# Altium PCB W5500_PCB.PcbDoc
Units mil, origin at the board's own origin, x right, y up, seen from the top; angles counter-clockwise.
Board outline 2170 x 1230 mil, 2 copper layers (Top Layer, Bottom Layer); 44 components, 37 nets, 156 pads, 37 vias.
Unrouted connection lines stored in the file: 1.
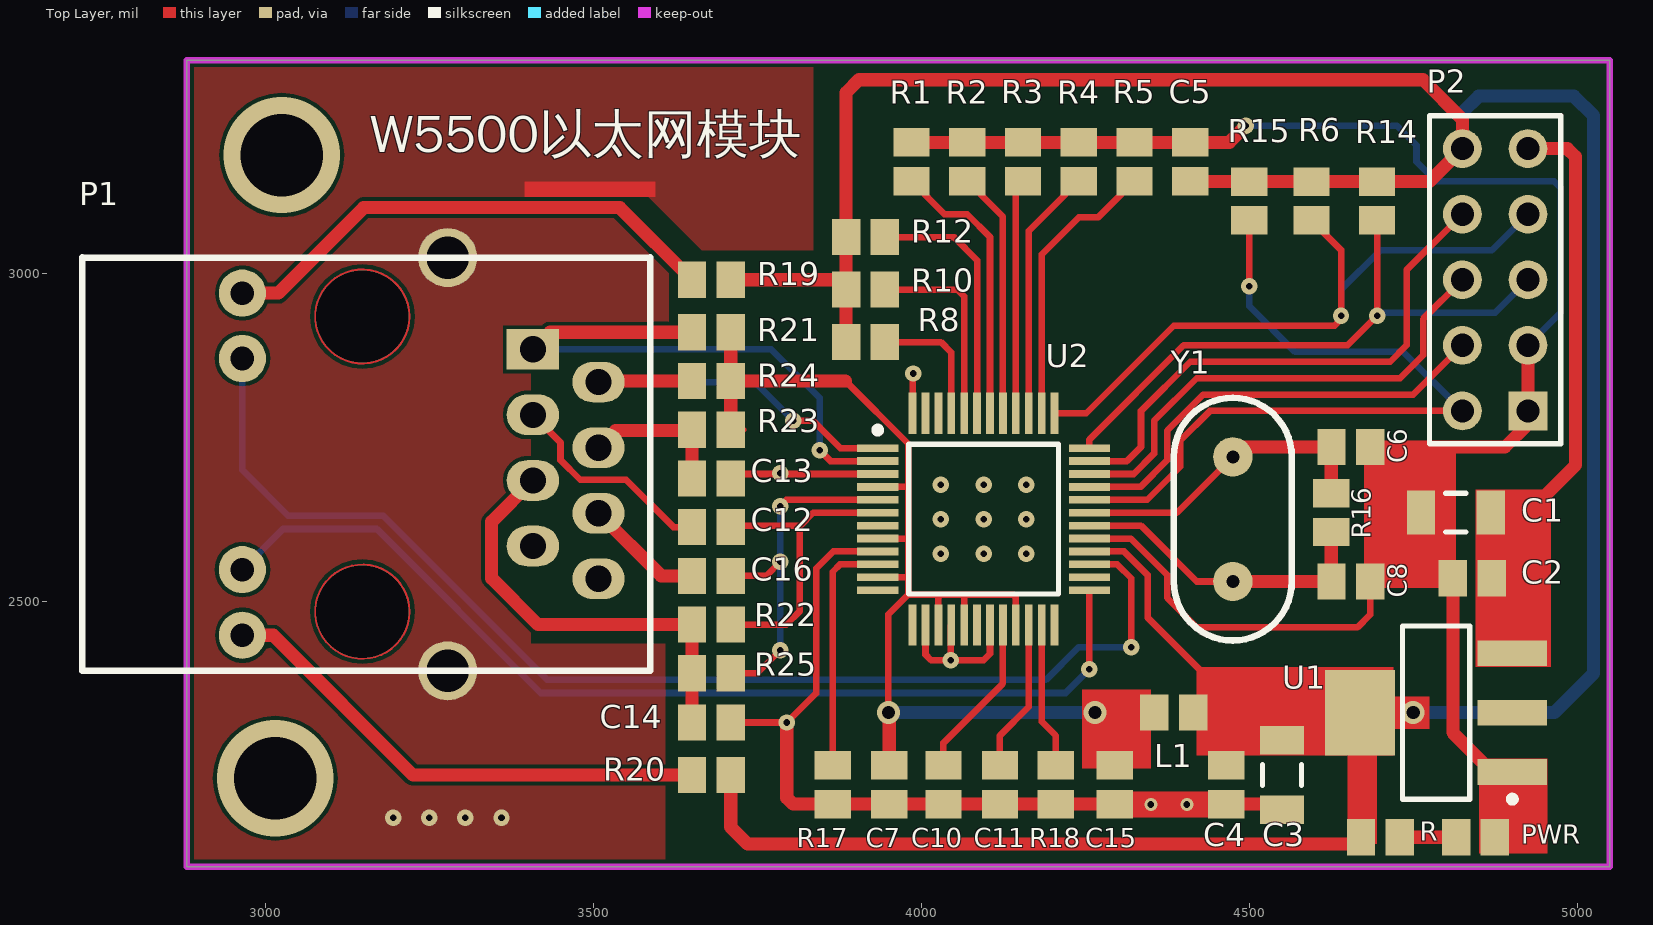
[diagram p0: Top Layer view]
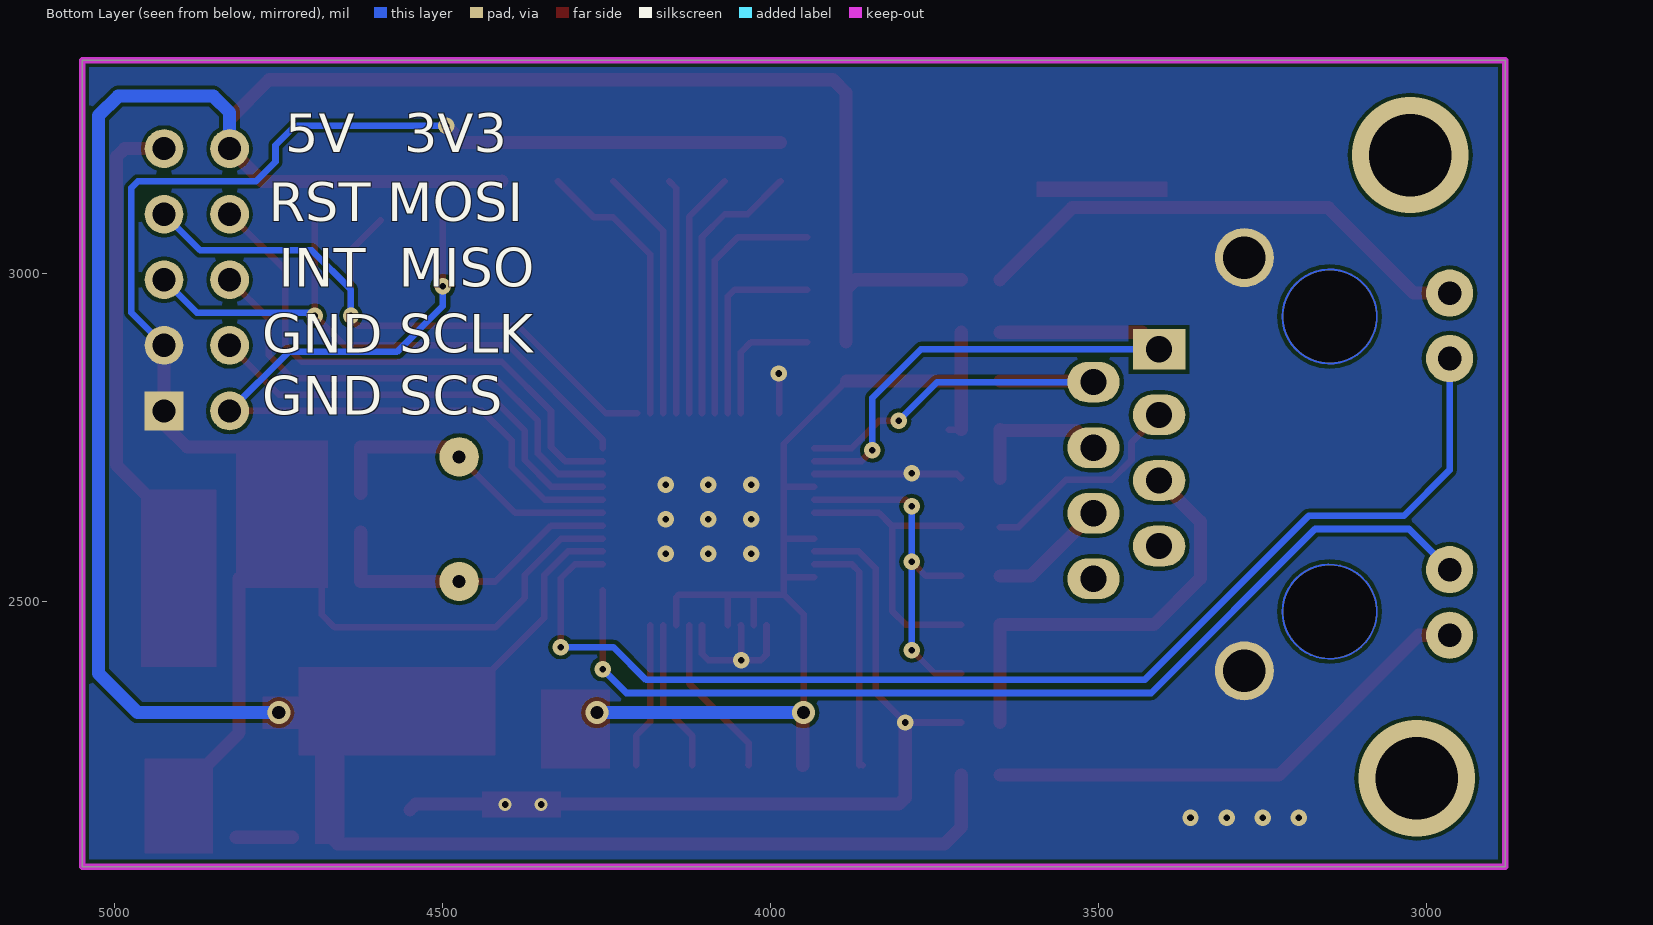
[diagram p1: Bottom Layer view, seen from below]

## Layer stack, top to bottom
Top Solder: solder mask 0.4, Solder Resist, Dk 3.5
Top Layer: signal copper 1.4
Dielectric 1: dielectric 12.6, FR-4, Dk 4.8
Bottom Layer: signal copper 1.4
Bottom Solder: solder mask 0.4, Solder Resist, Dk 3.5

## Board outline
2880,2095 2880,3325 5050,3325 5050,2095

## Design rules (kind name [scope] priority, off if disabled: settings)
Clearance [All] p1: gap=6 ignorepadtopadclearanceinfootprint=FALSE
DiffPairsRouting [All] p1: maxlimit=10 minlimit=5 mostfreqgap=10 toplayer_minwidth=2 toplayer_maxwidth=15 toplayer_prefwidth=15 bottomlayer_minwidth=2 bottomlayer_maxwidth=15 bottomlayer_prefwidth=15 maxuncoupledlength=500
PolygonConnect [All] p1: connectstyle=Direct reliefconductorwidth=10 reliefentries=4 polygonreliefangle="90 Angle" airgapwidth=10
RoutingVias [All] p1: holewidth=28 width=50 viastyle="Through Hole" minholewidth=200 minwidth=500 maxholewidth=0 maxwidth=0
SolderMaskExpansion [All] p1: expansion=3
Width [All] p1: maxlimit=50 minlimit=10 preferedwidth=10
29 further rules are at their usual default settings.

## Components (designator, comment, footprint, x,y, rotation, side; value= is the part's Value field where it differs from the comment)
C1 "tanCap" C1206 4815,2635 r180 top value=10uF
C2 "Cap" C0805 4840,2535 r180 top value=0.1uF
C3 "tanCap" C1206 4550,2235 r270 top value=10uF
C4 "Cap" C0805 4465,2220 r270 top value=0.1uF
C5 "Cap" C0805 4410,3170 r90 top value=0.1uF
C6 "Cap" C0805 4655,2735 r180 top value=18pF
C7 "Cap" C0805 3951.25,2220 r270 top value=0.1uF
C8 "Cap" C0805 4655,2530 r180 top value=18pF
C10 "Cap" C0805 4033.75,2220 r270 top value=4.7uF
C11 "Cap" C0805 4120,2220 r270 top value=0.01uF
C12 "Cap" C0805 3680,2612.86 r0 top value=6.8nF
C13 "Cap" C0805 3680,2687.14 r180 top value=22nF
C14 "Cap" C0805 3680,2315 r180 top value=0.01uF
C15 "Cap" C0805 4295,2220 r90 top value=0.1uF
C16 "Cap" C0805 3680,2538.57 r0 top value=6.8nF
L1 "Inductor" C0805 4385,2330 r180 top value=1uH
P1 "HR911105A" HR911105A 3407.91,2884 r180 top
P2 "排针引出" HDR2X5 4925,2790 r90 top
PWR "POWER" C0805 4845,2140 r0 top (schematic designator D1)
R "Res2" C0805 4700,2140 r180 top value=1K (schematic designator R13)
R1 "Res2" C0805 3985,3170 r90 top value=10K
R2 "Res2" C0805 4070,3170 r90 top value=10K
R3 "Res2" C0805 4155,3170 r90 top value=10K
R4 "Res2" C0805 4240,3170 r90 top value=10K
R5 "Res2" C0805 4325,3170 r90 top value=10K
R6 "Res2" C0805 4595,3110 r90 top value=10K
R8 "Res2" C0805 3915,2895 r180 top value=10K
R10 "Res2" C0805 3915,2975 r180 top value=10K
R12 "Res2" C0805 3915,3055 r180 top value=10K
R14 "Res2" C0805 4695,3110 r90 top value=10K
R15 "Res2" C0805 4500,3110 r90 top value=10K
R16 "Res2" C0805 4625,2635 r90 top value=1M
R17 "Res2" C0805 3865,2220 r90 top value="12.4K 1%"
R18 "Res2" C0805 4205,2220 r90 top value=10K
R19 "Res2" C0805 3680,2990 r180 top value=1K
R20 "Res2" C0805 3680,2235 r180 top value=1K
R21 "Res2" C0805 3680,2910 r0 top value=51R
R22 "Res2" C0805 3680,2464.29 r0 top value=82R
R23 "Res2" C0805 3680,2761.43 r0 top value=51R
R24 "Res2" C0805 3680,2835.71 r0 top value=51R
R25 "Res2" C0805 3680,2390 r180 top value=82R
U1 "AMS1117-3.3" SOT223_M 4785,2330 r180 top
U2 "W5500" LQFP48 4095,2625 r90 top
Y1 "25MHz" XTAL-HC49 4475,2530 r90 top

## Footprints (in the part's own frame and the unit in brackets; to place one, negate y for a bottom-side part, rotate by r counter-clockwise, add the part's x,y. Pads: shape width x height; smd on the part's side, far side on the other; paste and mask are expansions set on the pad)
C0805 [mm] "Chip Capacitor, Body 2.0x1.3mm, IPC High Density"
  rect 1.1x1.4 smd: 1(-0.75,0) 2(0.75,0)
  body extent -1.1,-0.72 1.1,0.72, height 1.4
C1206 [mm] "Chip Capacitor, Body 3.2x1.6mm, IPC High Density"
  rect 1.1x1.7 smd: 1(-1.35,0) 2(1.35,0)
  silkscreen extent -0.4,-0.75 0.4,0.75, body extent -1.7,-0.9 1.7,0.9, height 1.3
HDR2X5 [mm] "Connector; Header; 5x2 Position"
  rect 1.5x1.5 hole 0.9: 1(0,0)
  round 1.5 hole 0.9: 2(0,2.54) 3(2.54,0) 4(2.54,2.54) 5(5.08,0) 6(5.08,2.54) 7(7.62,0) 8(7.62,2.54) 9(10.16,0) 10(10.16,2.54)
  silkscreen extent -1.27,-1.27 11.43,3.81
HR911105A [mil]
  rect 80x62 hole 40: 1(0,0)
  oval 80x62 hole 40: 2(-100,50) 3(0,100) 4(-100,150) 5(0,200) 6(-100,250) 7(0,300) 8(-100,350)
  round 72 hole 36: 9(442.91,-85.63) 10(442.91,14) 11(442.91,335.87) 12(442.91,436)
  round 90 hole 65: 13(129.92,-139.76) 14(129.92,490.16)
  Multi-Layer circle w5: c260,-50 r70.8
  Multi-Layer circle w5: c260,400 r70.8
  silkscreen extent -179,-140 687,490
LQFP48 [mm]
  rect 0.3x1.6 smd: 1(2.75,4.1) 2(2.25,4.1) 3(1.75,4.1) 4(1.25,4.1) 5(0.75,4.1) 6(0.25,4.1) 7(-0.25,4.1) 8(-0.75,4.1) 9(-1.25,4.1) 10(-1.75,4.1) 11(-2.25,4.1) 12(-2.75,4.1) 25(-2.75,-4.1) 26(-2.25,-4.1) 27(-1.75,-4.1) 28(-1.25,-4.1) 29(-0.75,-4.1) 30(-0.25,-4.1) 31(0.25,-4.1) 32(0.75,-4.1) 33(1.25,-4.1) 34(1.75,-4.1) 35(2.25,-4.1) 36(2.75,-4.1)
  rect 1.6x0.3 smd: 13(-4.1,2.75) 14(-4.1,2.25) 15(-4.1,1.75) 16(-4.1,1.25) 17(-4.1,0.75) 18(-4.1,0.25) 19(-4.1,-0.25) 20(-4.1,-0.75) 21(-4.1,-1.25) 22(-4.1,-1.75) 23(-4.1,-2.25) 24(-4.1,-2.75) 37(4.1,-2.75) 38(4.1,-2.25) 39(4.1,-1.75) 40(4.1,-1.25) 41(4.1,-0.75) 42(4.1,-0.25) 43(4.1,0.25) 44(4.1,0.75) 45(4.1,1.25) 46(4.1,1.75) 47(4.1,2.25) 48(4.1,2.75)
  silkscreen extent -2.9,-2.9 3.57,4.22
SOT223_M [mm] "SOT223, 4-Leads, Body 6.5x3.5mm, Pitch 2.3mm, Lead Span 7mm, IPC Low Density"
  rect 2.7x1 smd: 1(-2.95,2.3) 2(-2.95,0) 3(-2.95,-2.3)
  rect 2.7x3.3 smd: 4(2.95,0)
  silkscreen extent -3.08,-3.35 1.3,3.47, body extent -1.85,-3.35 1.85,3.35, height 1.7
XTAL-HC49 [mil]
  round 60 hole 19.68: 1(0,0) 2(190,0)
  silkscreen extent -90,-90 280,90

## Part data
C1 C3: library part "Cap Pol2", "Polarized Capacitor (Axial)", LatestRevisionDate=17-Jul-2002, LatestRevisionNote="Re-released for DXP Platform.", PackageDescription="Polarized Capacitor; 2 Leads", PackageReference=POLAR0.8, Published=8-Jun-2000, Publisher="Altium Limited"
C2 C4 C5 C6 C7 C8 C10 C11 C12 C13 C14 C15 C16: "Capacitor", LatestRevisionDate=17-Jul-2002, LatestRevisionNote="Re-released for DXP Platform.", PackageDescription="Radial Cap, Thru-Hole; 2 Leads; 0.3 in Pin Spacing", PackageReference=RAD-0.3, Published=8-Jun-2000, Publisher="Altium Limited"
P1: "RJ45插座"
P2: library part "Header 5X2", "Header, 5-Pin, Dual row", LatestRevisionDate=17-Jul-2002, LatestRevisionNote="Re-released for DXP Platform.", Publisher="Altium Limited"
PWR: library part LED0, "Typical INFRARED GaAs LED", LatestRevisionDate=08-Jul-2005, LatestRevisionNote="Mech Layer 1 removed.", PackageDescription="LED; 2 Leads", PackageReference=LED-0, Published=8-Jun-2000, Publisher="Altium Limited"
R R1 R2 R3 R4 R5 R6 R8 R10 R12 R14 R15 R16 R17 R18 R19 R20 R21 R22 R23 R24 R25: "Resistor", LatestRevisionDate=17-Jul-2002, LatestRevisionNote="Re-released for DXP Platform.", PackageDescription="Axial Device, Thru-Hole; 2 Leads; 0.4 in Pin Spacing", PackageReference=AXIAL-0.4, Published=8-Jun-2000, Publisher="Altium Limited"
U1: library part AMS1117, "AMS1117-"
U2: "W5500以太网芯片"
Y1: library part XTAL, "Crystal Oscillator", LatestRevisionDate=17-Jul-2002, LatestRevisionNote="Re-released for DXP Platform.", PackageDescription="Crystal, Thru-Hole; 2 Leads; Body 3.1 x 8.2 mm (Dia.xH)", PackageReference=R38, Published=8-Jun-2000, Publisher="Altium Limited"
L1: Code_IEC=1005, Code_JEITA=0402, LatestRevisionDate=29-May-2009, LatestRevisionNote="IPC-7351 Footprint Added.", PackageDescription="Chip Inductor", PackageReference=0402-A, Published=8-Jun-2000, Publisher="Altium Limited"

## Via types
v1: diameter 25, hole 10, Top Layer to Bottom Layer, 28 vias
v2: diameter 35, hole 20, Top Layer to Bottom Layer, 3 vias
v3: diameter 20, hole 10, Top Layer to Bottom Layer, 2 vias
v4: diameter 141, hole 141, Top Layer to Bottom Layer, 2 vias
v5: diameter 177.17, hole 125.98, Top Layer to Bottom Layer, 2 vias

## Nets (pads, with @x,y where several pads share a name; then routed paths per layer and width w, separated by ;. In a path a pad name is that pad's centre, name@x,y a point inside that pad or via, vN(x,y) a via of type N, cw(c..) or ccw(c..) an arc to the next point about the centre after c; other vN are vias at no path point)
/INT: P2.5 R14.1 U2.36 | length 928.1
  Top Layer w10: U2.36 4256.42,2746.42 4400,2890 4650,2890 v1(4695,2935) R14.1
  Bottom Layer w10: v1(4695,2935) 4700,2940 4875,2940 P2.5
/RESET: P2.7 R6.1 U2.37 | length 1045
  Top Layer w10: U2.37 4251.42,2786.42 4385,2920 4630,2920 4645,2935 v1(4640,2935) 4640,3035.47 R6.1
  Bottom Layer w10: v1(4640,2935) 4640,2975 4700,3035 4870,3035 P2.7
/SPI-SCS: P2.2 R15.1 U2.32 | length 1169.9
  Top Layer w10: U2.32 4344.53,2654.53 4395,2705 4395,2745 4440,2790 P2.2 ; v1(4500,2980) R15.1
  Bottom Layer w10: v1(4500,2980) 4500,2950 4570,2880 4735,2880 P2.2
ACTLED: P1.10 U2.27 | length 1855.6
  Top Layer w10: U2.27 4298.9,2556.1 4320,2535 v1(4320,2430)
  Bottom Layer w10: P1.10 2965,2700 3035,2630 3180,2630 3430,2380 4190,2380 4240,2430 v1(4320,2430)
GND: C1.2 C2.2 C3.2 C4.2 C5.2 C6.1 C7.2 C8.1 C10.2 C11.2 C13.1 C14.1 C15.1 P1.13 P1.14 P2.1 P2.3 PWR.2 R1.2 R2.2 R3.2 R4.2 R5.2 R17.1 R18.1 U1.1 U2.3 U2.9 U2.14 U2.16 U2.19 U2.29 U2.48 | length 4366.7
  Top Layer w10: C14.1 v1(3795,2315) 3840,2360 3840,2550 3865.79,2575.79 U2.9 ; C13.1 3716.28,2693.9 U2.3 ; U2.48 3986.73,2845.94 v1(3987.89,2847.11) ; U2.14 4006.42,2418.58 4015,2410 v1(4045,2410) ; U2.16 4045,2462.8 v1(4045,2410) ; U2.19 4104.84,2419.84 4095,2410 v1(4045,2410) ; U2.29 4319.53,2595.47 4375,2540 4375,2505 4420,2460 4665,2460 4684.53,2479.53 C8.1
  Top Layer w20: v1(3795,2315) 3795,2200 3804.53,2190.47 R17.1 R18.1 C15.1 C4.2 4541.38,2190.47 C3.2 ; R1.2 R2.2 R3.2 R4.2 R5.2 C5.2 4469.53,3199.53 v1(4495,3225) ; 4780,2735 4890,2735 4925,2770 P2.1 P2.3 ; C2.2 4810.47,2299.53 4870.55,2239.45 U1.1
  Bottom Layer w10: v1(4495,3225) 4725,3225 4755,3195 4755,3170 4785,3140 4965,3140 4975,3130 4975,2940 P2.3
  other v1: 3195,2170 3250,2170 3305,2170 3360,2170 4030,2572.5 4095,2572.5 4160,2572.5 4030,2625 4095,2625 4160,2625 4030,2677.5 4095,2677.5 4160,2677.5 3785,2695
  other v3: 4350,2190 4405,2190
LINKLED: P1.11 U2.25 | length 1556
  Top Layer w10: v1(4256.42,2396.42) U2.25
  Bottom Layer w10: P1.11 3026.87,2610 3170,2610 3420,2360 4220,2360 v1(4256.42,2396.42)
NetC10_1: C10.1 U2.20 | length 252.8
  Top Layer w10: C10.1@4034.53,2250.31 C10.1 4033.75,2283.75 4124.53,2374.53 U2.20
NetD1_1: PWR.1 R.1 | length 85.9
  Top Layer w20: R.1 PWR.1
NetP1_9: P1.9 R19.2 | length 785
  Top Layer w20: P1.9 3019.63,2969.63 3150,3100 3540.47,3100 R19.2
NetP1_12: P1.12 R20.2 | length 773.7
  Top Layer w20: P1.12 3012,2448 3225,2235 R20.2
NetR1_1: R1.1 U2.42 | length 423.9
  Top Layer w10: R1.1 4035.47,3090 4070,3090 4104.84,3055.16 U2.42
NetR2_1: R2.1 U2.41 | length 376.6
  Top Layer w10: R2.1 4124.53,3085.94 U2.41
NetR3_1: R3.1 U2.40 | length 358.5
  Top Layer w10: U2.40 4144.21,3129.68 R3.1
NetR4_1: R4.1 U2.39 | length 385.6
  Top Layer w10: U2.39 4163.9,3064.37 R4.1
NetR5_1: R5.1 U2.38 | length 429.9
  Top Layer w10: U2.38 4183.58,3028.58 4240,3085 4269.53,3085 R5.1
NetR17_2: R17.2 U2.10 | length 368.7
  Top Layer w10: R17.2 3865,2545 3876.1,2556.1 U2.10
NetR18_2: R18.2 U2.23 | length 222.9
  Top Layer w10: U2.23 4183.58,2316.42 4205,2295 R18.2
PMODE0: R8.1 U2.45 | length 200.6
  Top Layer w10: R8.1 4030,2895 4045.79,2879.21 U2.45
PMODE1: R10.1 U2.44 | length 303.4
  Top Layer w10: R10.1 4055,2975 4065.47,2964.53 U2.44
PMODE2: R12.1 U2.43 | length 388.6
  Top Layer w10: R12.1 4050,3055 4085.16,3019.84 U2.43
RCT: C14.2 P1.5 R22.1 R25.2 | length 659.1
  Top Layer w20: P1.5 3345,2621.09 3345,2535 3415.71,2464.29 R22.1 R25.2 C14.2
RXN: C16.2 R25.1 U2.5 | length 546.8
  Top Layer w10: R25.1 3750,2390 v1(3785,2425) ; C16.2 3763.57,2538.57 v1(3785,2560) ; v1(3785,2645) 3794.53,2654.53 U2.5
  Bottom Layer w10: v1(3785,2425) v1(3785,2560) v1(3785,2645)
RXNNET: C16.1 P1.6 | length 182.1
  Top Layer w20: P1.6 3603.34,2538.57 C16.1
RXP: C12.2 R22.2 U2.6 | length 476.9
  Top Layer w10: R22.2 3794.29,2464.29 3815,2485 3815,2614.69 ; C12.2 3711.36,2614.69 3815,2614.69 ; U2.6 3835.16,2634.84 3815,2614.69
RXPNET: C12.1 P1.3 | length 329.2
  Top Layer w10: P1.3 3450,2741.91 3450,2715 3480,2685 3550,2685 3622.14,2612.86 C12.1
SPI-MISO: P2.6 U2.34 | length 752.7
  Top Layer w10: U2.34 4323.9,2693.9 4355,2725 4355,2775 4420,2840 4730,2840 4765,2875 4765,2930 P2.6
SPI-MOSI: P2.8 U2.35 | length 824.1
  Top Layer w10: U2.35 4313.58,2713.58 4335,2735 4335,2790 4410,2865 4715,2865 4740,2890 4740,3005 P2.8
SPI-SCLK: P2.4 U2.33 | length 684.3
  Top Layer w10: U2.33 4334.21,2674.21 4375,2715 4375,2760 4430,2815 4750,2815 P2.4
TCT: C13.2 P1.4 R23.1 | length 228.2
  Top Layer w20: P1.4 3533.91,2760 3649.04,2760 R23.1 C13.2
TXN: P1.2 R24.1 U2.1 | length 610.7
  Top Layer w10: v1(3805,2775) 3835,2775 3876.73,2733.27 U2.1
  Top Layer w20: P1.2 3509.63,2835.71 R24.1
  Bottom Layer w10: P1.2 3746,2834 v1(3805,2775)
TXP: P1.1 R21.1 U2.2 | length 896.4
  Top Layer w10: v1(3845,2730) 3861.42,2713.58 U2.2
  Top Layer w20: P1.1 3433.91,2910 3590,2910 R21.1
  Bottom Layer w10: P1.1 3771,2884 3845,2810 v1(3845,2730)
VCC-1V2: C11.1 U2.22 | length 232.2
  Top Layer w10: C11.1 4120,2295 4163.9,2338.9 U2.22
VCC-3V3A: C7.1 C15.2 L1.2 R21.2 R23.2 R24.2 U2.4 U2.8 U2.11 U2.15 U2.17 U2.21 | length 1735.7
  Top Layer w10: R23.2 R23.2@3728.57,2761.43 ; 3884.29,2835.71 3980,2740 3980,2670 3980,2595 ; U2.11 3976.42,2536.42 3980,2540 ; U2.8 3979.53,2595.47 3980,2595 ; U2.4 3975.79,2674.21 ; v2(3950,2330) 3950,2480 3980,2510 ; U2.15 4026.1,2506.1 4030,2510 ; U2.17 4065.47,2509.53 4065,2510 ; U2.21 4144.21,2505.79 4140,2510 4065,2510 ; 3980,2510 3980,2540 ; 3980,2510 4030,2510 ; 3980,2540 3980,2595 ; 4030,2510 4065,2510
  Top Layer w20: R23.2 R24.2 ; R21.2 R24.2 ; 3884.29,2835.71 R24.2 ; v2(3950,2330) 3951.25,2328.75 C7.1
  Bottom Layer w20: v2(3950,2330) v2(4265,2330)
VCC-3V3D: C3.1 C4.1 C5.1 L1.1 P2.10 R6.2 R8.2 R10.2 R12.2 R14.2 R15.2 R19.1 R20.1 R.2 U1.2 U1.4 U2.28 | length 4816.1
  Top Layer w10: U2.28 4309.21,2575.79 4345,2540 4345,2475 4450,2370
  Top Layer w20: R20.1 3709.53,2155.47 3735,2130 4660.47,2130 R.2 ; R19.1 3870.47,2990 R10.2 ; R8.2 R10.2 ; C5.1 4410.94,3139.53 R15.2 R6.2 R14.2 4774.53,3139.53 P2.10 4825,3235 4765,3295 3905,3295 3885.47,3275.47 R12.2 R10.2
  Bottom Layer w20: v2(4750,2330) 4965,2330 5025,2390 5025,3240 4995,3270 4850,3270 4825,3245 P2.10
VCC-5V: C1.1 C2.1 P2.9 U1.3 | length 621.9
  Top Layer w20: P2.9 4985,3190 4997.5,3177.5 4997.5,2707.5 4945,2655
XI: C8.2 R16.1 U2.30 Y1.1 | length 480
  Top Layer w10: U2.30 4334.84,2615.16 4420,2530 Y1.1
  Top Layer w20: Y1.1 C8.2 4625,2530.47 R16.1
XO: C6.2 R16.2 U2.31 Y1.2 | length 481.2
  Top Layer w10: U2.31 4389.84,2634.84 Y1.2
  Top Layer w20: Y1.2 4490,2735 C6.2 4625,2734.53 R16.2
pads on no net: P1.7 P1.8 U2.7 U2.12 U2.13 U2.18 U2.24 U2.26 U2.46 U2.47
copper on no net:
  other v4: 3147.91,2484 3147.91,2934
  other v5: 3015,2230 3025,3180

## Polygon pours and split planes (outlines as drawn)
GND on Bottom Layer "Bottom Layer-GND 1" (solid, pour order 24): 2880,3325 5050,3325 5050,2095 2880,2095
GND on Bottom Layer "Bottom Layer-GND" (solid, remove dead copper, pour order 4): 3435,3275
GND on Top Layer "Top Layer-GND" (solid, pour order 42): 3405,3083.69 3405,2921 3614,2921 3615,2920 3615,3000 3530,3085
GND on Top Layer "Top Layer-GND 2" (solid, pour order 38): 2880,3325 2880,2095 3610,2095 3610,2435 3405,2435 3405,3125 3575,3125 3665,3035 3835,3035 3835,3325
GND on Top Layer "Top Layer-GND 3" (solid, pour order 30): 2880,2100
GND on Top Layer "Top Layer-GND 1" (solid, pour order 16): 3805,3315

## Keep-outs
Keep-Out Layer:
  lines w10: 2880,2095 2880,3325 3422.5,3325 4507.5,3325 5050,3325 5050,2095 2880,2095

## Other copper
Top Layer:
  rectangle net GND: 4675,2520 4815,2745
  rectangle net GND: 4320,2170 4440,2210
  rectangle net GND: 3395,3116.31 3595,3140
  rectangle net VCC-3V3D: 4650,2130 4695,2275
  rectangle net GND: 4850,2115 4955,2260
  rectangle net VCC-3V3A: 4245,2245 4350,2365
  rectangle net VCC-3V3D: 4420,2265 4720,2400
  rectangle net VCC-3V3D: 4720,2305 4775,2355
  rectangle net VCC-5V: 4845,2400 4960,2670

## Silkscreen, mask and mechanical layers (free items; w line width, h text height)
Top Overlay:
  text "四个角改成圆弧" at 2850,3425 h60
  text "W5500以太网模块" at 3160,3165 h100
Bottom Overlay:
  text "5V   3V3" at 4740,3165 h100
  text "RST MOSI" at 4765,3060 h100
  text "INT  MISO" at 4750,2960 h100
  text "GND SCLK" at 4775,2860 h100
  text "GND SCS" at 4775,2765 h100